# Altium PCB RGB_CA_v1.0.PcbDoc
Units mm, origin at the board's own origin, x right, y up, seen from the top; angles counter-clockwise.
Board outline 10.54 x 11.56 mm, 2 copper layers (Top Layer, Bottom Layer), stack 1.569 mm thick; 5 components, 7 nets, 15 pads, 3 vias.
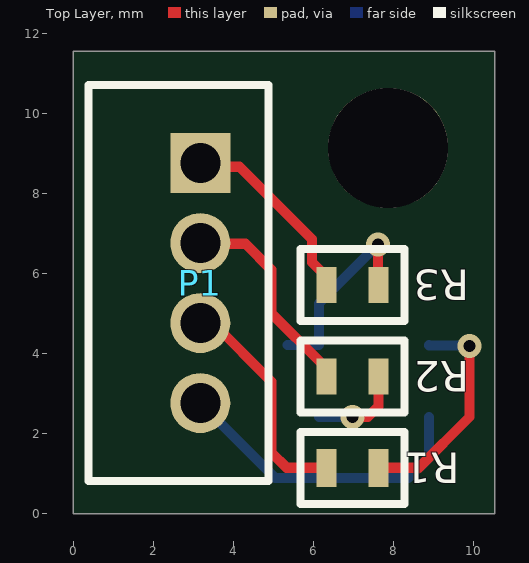
[diagram p0: Top Layer view]
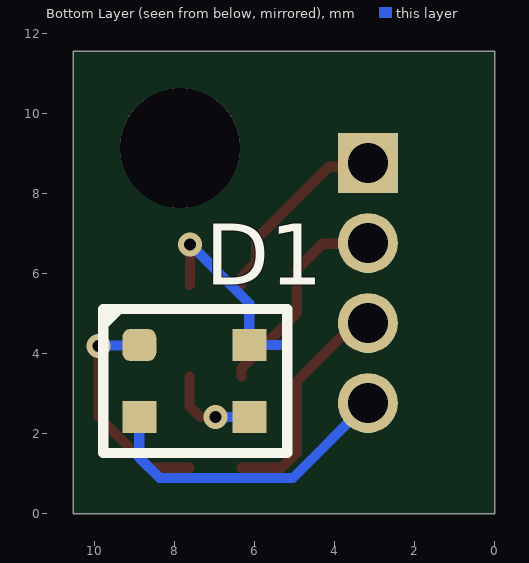
[diagram p1: Bottom Layer view, seen from below]
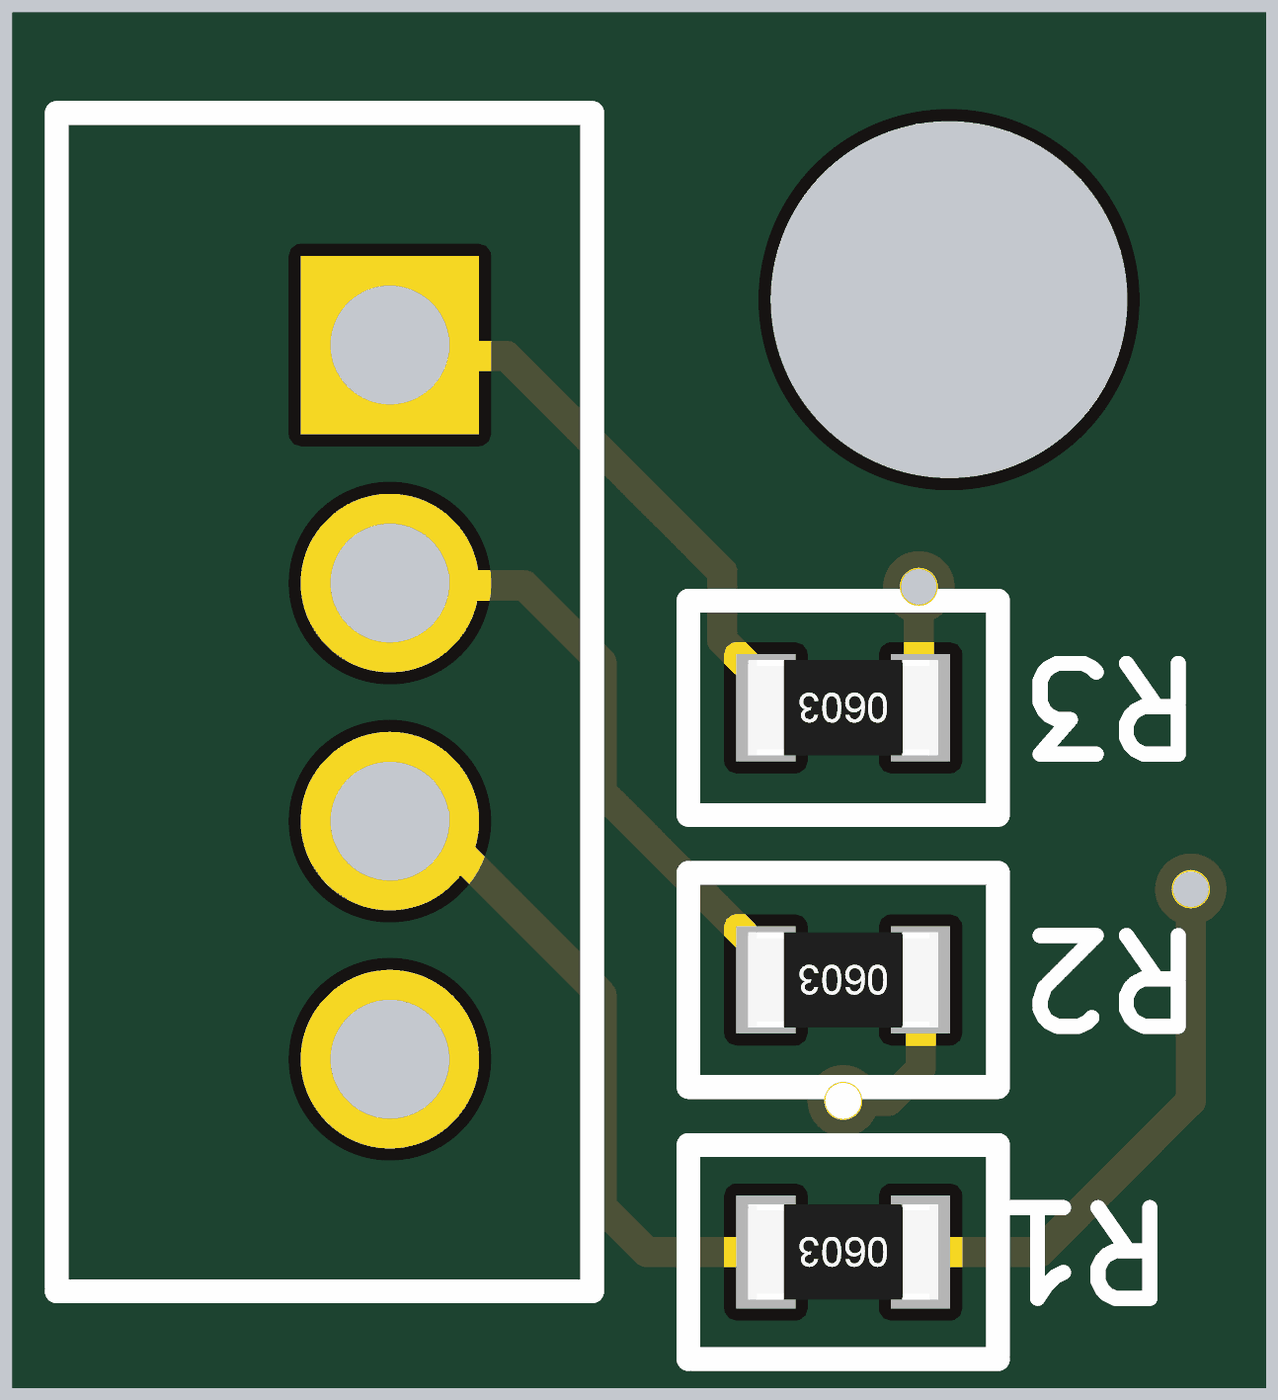
[diagram p2: 3D render of the assembled board from above, using the file's embedded part models]

## Layer stack, top to bottom
Top Solder: solder mask 0.0254, SM-001, Dk 4
Top Layer: signal copper 0.035
Dielectric 1: core 1.4986, Core-043, Dk 4.3
Bottom Layer: signal copper 0.035
Bottom Solder: solder mask 0.0254, SM-001, Dk 4

## Board outline
0,0 10.541,0 10.541,11.557 0,11.557

## Design rules (kind name [scope] priority, off if disabled: settings)
Clearance [All] p1: gap=0.254 ignorepadtopadclearanceinfootprint=FALSE except(0: Arc-Hole Track-Hole SMDPad-Hole THPad-Hole Via-Hole Fill-Hole Poly-Hole Region-Hole Text-Hole)
PolygonConnect [All] p1: connectstyle=Relief reliefconductorwidth=0.254 reliefentries=4 polygonreliefangle="90 Angle" airgapwidth=0.254
RoutingVias [All] p1: holewidth=0.711 width=1.27 viastyle="Through Hole" minholewidth=0.711 minwidth=1.27 maxholewidth=0.711 maxwidth=1.27
SolderMaskExpansion [All] p1: expansion=0.102 istentingtop=FALSE
Width [All] p1: maxlimit=0.254 minlimit=0.254 preferedwidth=0.254
30 further rules are at their usual default settings.

## Components (designator, comment, footprint, x,y, rotation, side; value= is the part's Value field where it differs from the comment)
D1 "LED - RGB CA" "LED RGB CA 3528" 8.89,4.213 r180 bottom
P1 "B4B-PH-K-S(LF)(SN)" JST-B4B-PH-K-S_V 2.625,5.763 r270 top
R1 "68R" "68R 0603" 6.985,1.143 r180 top
R2 "4.7R" "4.7R 0603" 6.985,3.429 r180 top
R3 "4.7R" "4.7R 0603" 6.985,5.715 r180 top

## Footprints (in the part's own frame and the unit in brackets; to place one, negate y for a bottom-side part, rotate by r counter-clockwise, add the part's x,y. Pads: shape width x height; smd on the part's side, far side on the other; paste and mask are expansions set on the pad)
"4.7R 0603" [mm]
  rect 0.5x0.9 smd: 1(-0.65,0) 2(0.65,0)
  silkscreen extent -1.3,-0.9 1.3,0.9, body extent -0.8,-0.4 0.8,0.4, height 0.45
"68R 0603" [mm]
  rect 0.5x0.95 smd: 1(-0.65,0) 2(0.65,0)
  silkscreen extent -1.3,-0.9 1.3,0.9, body extent -0.8,-0.4 0.8,0.4, height 0.45
JST-B4B-PH-K-S_V [mm] "Connector, 4-Leads, Body 9.9x4.5mm, Pitch 2mm"
  rect 1.5x1.5 hole 1: 1(-3,0.55)
  round 1.5 hole 1: 2(-1,0.55) 3(1,0.55) 4(3,0.55)
  silkscreen extent -4.95,-2.25 4.95,2.25, body extent -4.95,-2.25 4.95,2.25, height 6
"LED RGB CA 3528" [mm]
  rrect50% 0.85x0.8 smd: 1(0,0)
  rect 0.85x0.8 smd: 2(0,-1.8) 3(2.75,-1.8) 4(2.75,0)
  silkscreen extent -0.9,-2.7 3.7,0.9, body extent -0.45,-2.3 3.05,0.5, height 1.91

## Part data
D1: library part CLV1A-FKB-CK1VW1DE1BB7C3C3, "Multicolor LED Red/Green/Blue 624nm/535nm/475nm 50mA/25mA/25mA 4-Pin SMD T/R", Case/Package=PLCC, Color=Blue,Green,Red, Forward Voltage=3.2V, Manufacturer=Cree, Supplier Part Number 1=CLV1A-FKB-CK1VW1DE1BB7C3C3CT-ND, Test Current=20mA, Category=LEDs, ComponentLink1Description=http://www.farnell.com/datasheets/2606189.pdf?src-supplier=Farnell, ComponentLink1URL=http://www.farnell.com/datasheets/2606189.pdf?src-supplier=Farnell, ComponentLink2Description=https://www.cree.com/led-components/media/documents/ds-CLV1A-FKB.pdf?src-supplier=Digi-Key, ComponentLink2URL=https://www.cree.com/led-components/media/documents/ds-CLV1A-FKB.pdf?src-supplier=Digi-Key, Dominant Wavelength=468nm, Element Configuration="Common Anode", Height=2.1mm, Length=3.2mm, Lens Style=Round,Flat, Luminous Intensity=310mcd, Manufacturer Part Number=CLV1A-FKB-CK1VW1DE1BB7C3C3, Mount="Surface Mount", Number of Pins=4, Packaging="Cut Tape", Pricing 1="1=0.42000, 10=0.39500, 100=0.36480, 1000=0.32631 (USD)", RoHS=No, Stock 1=95758, Supplier 1=Digi-Key, Width=2.8mm
P1: library part CMP-2000-05165-1, "Male Header, Pitch 2 mm, 1 x 4 Position, Height 6 mm, Tail Length 3.4 mm, -25 to 85 degC, RoHS, Bulk", Manufacturer=JST, Datasheet URL=http://datasheet.octopart.com/B4B-PH-K-S%28LF%29%28SN%29-JST-datasheet-10558886.pdf, Datasheet Version=Apr-09, Manufacturer URL=http://www.jst.com/home2.html, No of Positions=4, Pitch=2mm, Style/Orientation=StraightHeader/Plug, Termination=Crimp, Type=ShroudedHeader
R1: library part CRGP0603F68R, "CRGP 0603 68R 1%", Case Code (Imperial)=0603, Case Code (Metric)=1608, Manufacturer="TE Connectivity", Max Operating Temperature=155°C, Max Power Dissipation=250mW, Min Operating Temperature=-55°C, Resistor Type="Thick Film", Supplier Part Number 1=A130402CT-ND, Temperature Coefficient=200ppm/°C, Tolerance=1%, Case/Package=0603, Category="Chip SMD Resistors", ComponentLink1Description=https://www.te.com/commerce/DocumentDelivery/DDEController?Action=srchrtrv&amp;DocNm=9-1773463-9&amp;DocType=DS&amp;DocLang=English&src-supplier=Digi-Key, ComponentLink1URL=https://www.te.com/commerce/DocumentDelivery/DDEController?Action=srchrtrv&amp;DocNm=9-1773463-9&amp;DocType=DS&amp;DocLang=English&src-supplier=Digi-Key, Manufacturer Part Number=CRGP0603F68R, Number of Terminations=2, Packaging="Tape and Reel", Pricing 1="1=0.14000, 10=0.11400, 100=0.04470, 1000=0.01870, 2500=0.01714 (USD)", Resistance=68R, RoHS=No, Stock 1=49308, Supplier 1=Digi-Key
R2 R3: library part CRGCQ0603J4R7, Manufacturer="TE Connectivity", Supplier Part Number 1=A130077CT-ND, Category="Chip SMD Resistors", Manufacturer Part Number=CRGCQ0603J4R7, Pricing 1="1=0.10000, 10=0.01900, 100=0.00780, 1000=0.00352, 2500=0.00306 (USD)", RoHS=No, Stock 1=47068, Supplier 1=Digi-Key

## Free pads (board coordinates)
  round 3 hole 3 unplated: ""(7.874,9.144)

## Via types
v1: diameter 0.6, hole 0.3, Top Layer to Bottom Layer, tented both sides, 3 vias

## Nets (pads, with @x,y where several pads share a name; then routed paths per layer and width w, separated by ;. In a path a pad name is that pad's centre, name@x,y a point inside that pad or via, vN(x,y) a via of type N, cw(c..) or ccw(c..) an arc to the next point about the centre after c; other vN are vias at no path point)
+3V3: D1.2 P1.4 | length 7.7
  Bottom Layer w0.254: P1.4 5.049,0.889 8.382,0.889 8.89,1.397 D1.2
BLUE: P1.2 R2.2 | length 5.3
  Top Layer w0.254: P1.2 3.195,6.743 4.306,6.743 4.953,6.096 4.953,5.011 6.212,3.752 6.335,3.629 R2.2
GREEN: P1.1 R3.2 | length 4.9
  Top Layer w0.254: P1.1 3.268,8.67 4.157,8.67 5.969,6.858 5.969,6.281 6.335,5.915 R3.2
NetD1_1: D1.1 R1.1 | length 5.6
  Top Layer w0.254: R1.1 8.636,1.143 9.906,2.413 v1(9.906,4.191)
  Bottom Layer w0.254: D1.1 8.901,4.202 9.895,4.202 v1(9.906,4.191)
NetD1_3: D1.3 R2.1 | length 2.4
  Top Layer w0.254: v1(6.985,2.413) 7.366,2.413 7.635,2.682 R2.1
  Bottom Layer w0.254: D1.3 v1(6.985,2.413)
NetD1_4: D1.4 R3.1 | length 4.9
  Top Layer w0.254: v1(7.62,6.731) 7.62,5.73 R3.1
  Bottom Layer w0.254: 5.356,4.213 D1.4 6.14,5.251 v1(7.62,6.731)
RED: P1.3 R1.2 | length 5.7
  Top Layer w0.254: P1.3 3.492,4.763 4.953,3.302 4.953,1.524 5.334,1.143 R1.2